# Altium PCB smartwatch.PcbDoc
Units mm, origin at the board's own origin, x right, y up, seen from the top; angles counter-clockwise.
Board outline 90 x 40 mm, 2 copper layers (TOP01, BOTTOM04); 73 components, 55 nets, 301 pads, 503 vias.
Unrouted connection lines stored in the file: 2.
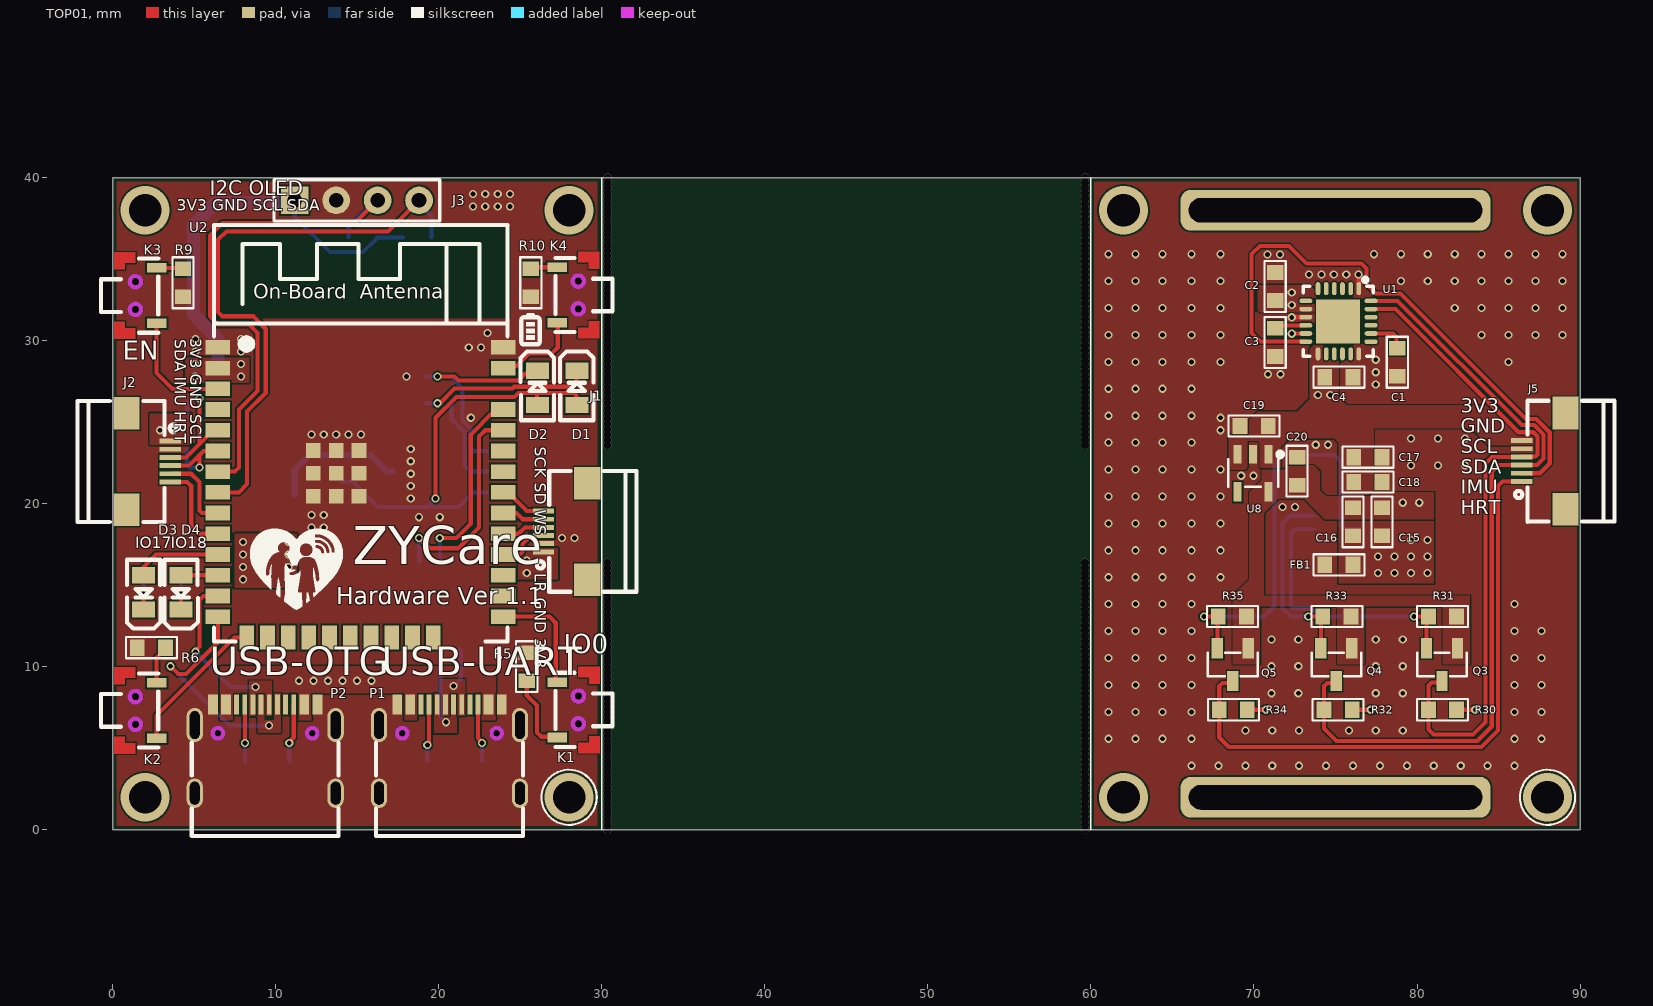
[diagram p0: TOP01 view]
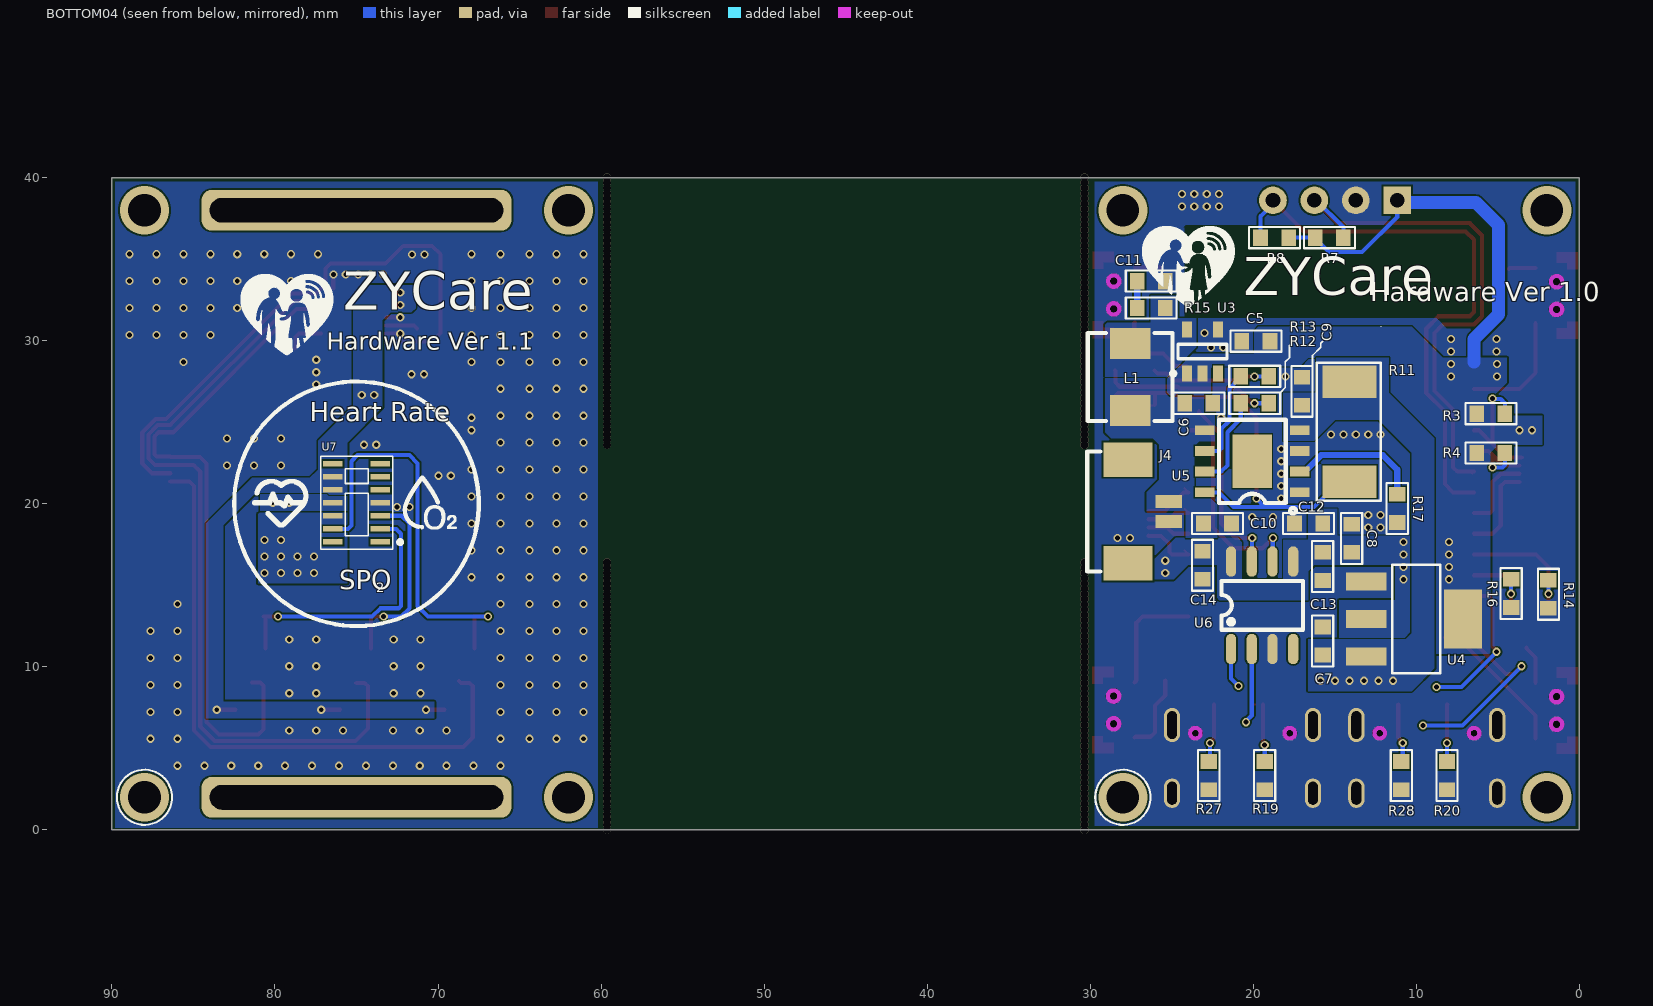
[diagram p1: BOTTOM04 view, seen from below]

## Layer stack, top to bottom
Top Solder: solder mask 0.0102, Solder Resist, Dk 3.5
TOP01: signal copper 0.0356
Dielectric 1: dielectric 0.32, FR-4, Dk 4.8
BOTTOM04: signal copper 0.0356
Bottom Solder: solder mask 0.0102, Solder Resist, Dk 3.5

## Board outline
0,0 90,0 90,40 0,40

## Design rules (kind name [scope] priority, off if disabled: settings)
Clearance [All] p1: gap=0.1 ignorepadtopadclearanceinfootprint=TRUE
ComponentClearance [All] p1 off: gap=0 collisioncheckmode=3 verticalgap=0 showdistances=FALSE
HoleToHoleClearance [All] p1: gap=0 allowstackedmicrovias=TRUE
PolygonConnect [All] p1: connectstyle=Direct reliefconductorwidth=0.254 reliefentries=4 polygonreliefangle="90 Angle" airgapwidth=0.254
RoutingVias [All] p1: holewidth=0.3 width=0.5 viastyle="Through Hole" minholewidth=0.3 minwidth=0.5 maxholewidth=9 maxwidth=10
SolderMaskExpansion [IsVia] p1: expansion=0.102 istentingtop=TRUE
SupplyNets "Schematic Supply Nets_2" [InNet('AGND')] p1: voltage=0.000
SupplyNets "Schematic Supply Nets" [InNet('GND')] p2: voltage=0.000
Width [All] p1: maxlimit=100 minlimit=0.1 preferedwidth=0.254
Width Width_PWR [InNetClass('All Nets')] p2: maxlimit=100 minlimit=0.127 preferedwidth=0.381
28 further rules are at their usual default settings.

## Classes and differential pairs
net class PWR: 1V8 3V3 5V0 AGND GND VBAT

## Components (designator, comment, footprint, x,y, rotation, side; value= is the part's Value field where it differs from the comment)
C1 "0.1uF" 0603 78.79,27.816 r90 top
C2 "10nF" 0603 71.297,34.187 r270 top
C3 "0.1uF" 0603 71.297,29.033 r90 top
C4 "0.1uF" 0603 76.07,27.763 r180 top
C5 "10uF" 0603 20.701,29.972 r180 bottom
C6 "10uF" 0603 22.479,26.162 r0 bottom
C7 "10uF" 0603 15.748,12.446 r270 bottom
C8 "10uF" 0603 13.97,18.743 r270 bottom
C9 "10uF" 0603 17.018,27.76 r270 bottom
C10 "10uF" 0603 21.336,18.796 r0 bottom
C11 "4.7nF" 0603 25.4,33.655 r0 bottom
C12 "10uF" 0603 17.473,18.796 r180 bottom
C13 "0.1uF" 0603 15.748,15.293 r90 bottom
C14 "0.1uF" 0603 23.114,15.367 r90 bottom
C15 "0.1uF" 0603 77.851,19.759 r270 top
C16 "4.7uF" 0603 76.073,19.759 r270 top
C17 "0.1uF" 0603 77.851,22.86 r180 top
C18 "10uF" 0603 77.851,21.336 r180 top
C19 "1uF" 0603 69.141,24.765 r0 top
C20 "1uF" 0603 72.644,22.86 r270 top
D1 "LED" LED0805-R-RD 28.448,27.051 r270 top
D2 "LED" LED0805-R-RD 26.035,27.051 r270 top
D3 "LED" LED0805-R-RD 1.932,14.633 r90 top
D4 "LED" LED0805-R-RD 4.218,14.633 r90 top
FB1 "BLM18PG121SN1D" 0603 74.348,16.256 r0 top
J1 "CON6" FPC-SMD_P0.50-6P_AFC01-S06FCA-00 29.083,18.288 r90 top locked
J2 "CON6" FPC-SMD_P0.50-6P_AFC01-S06FCA-00 0.889,22.606 r270 top locked
J3 "CON4" HDR2.54-M-LI-4P 14.986,38.608 r0 top
J4 "CON2" SIP-1.25-2P 27.686,22.7 r270 bottom locked
J5 "CON6" FPC-SMD_P0.50-6P_AFC01-S06FCA-00 89.071,22.606 r90 top
K1 "TS24CA" SW-SMD_TS24CA 28.575,7.341 r270 top
K2 "TS24CA" SW-SMD_TS24CA 1.397,7.341 r90 top
K3 "TS24CA" SW-SMD_TS24CA 1.397,32.786 r90 top
K4 "TS24CA" SW-SMD_TS24CA 28.565,32.786 r270 top
L1 "10uH" IND-SMD_L5.4-W5.2_FXL0530 27.559,27.813 r90 bottom
P1 "USBC-16PIN" USB-C-SMD_G-SWITCH_GT-USB-7010ASV 20.701,3.302 r0 top locked
P2 "USBC-16PIN" USB-C-SMD_G-SWITCH_GT-USB-7010ASV 9.398,3.302 r0 top locked
Q3 "SI2302" SOT-23-3_L2.9-W1.3-P1.90-LS2.4-BR 81.534,10.287 r90 top
Q4 "SI2302" SOT-23-3_L2.9-W1.3-P1.90-LS2.4-BR 75.057,10.287 r90 top
Q5 "SI2302" SOT-23-3_L2.9-W1.3-P1.90-LS2.4-BR 68.707,10.287 r90 top
R3 "2.2K" 0603 4.572,25.527 r0 bottom
R4 "2.2K" 0603 4.572,23.114 r0 bottom
R5 "470R" 0603 25.4,9.144 r90 top
R6 "470R" 0603 3.249,11.176 r180 top
R7 "2.2K" 0603 16.203,36.322 r180 bottom
R8 "2.2K" 0603 17.833,36.322 r0 bottom
R9 "470R" 0603 4.318,34.417 r270 top
R10 "470R" 0603 25.654,34.417 r270 top
R11 "0.4R" 2512 14.097,24.511 r90 bottom
R12 "470R" 0603 20.775,26.162 r180 bottom
R13 "470R" 0603 20.775,27.813 r180 bottom
R14 "470R" 0603 1.905,13.589 r90 bottom
R15 "0.5R" 0603 27.125,32.004 r180 bottom
R16 "470R" 0603 4.191,13.642 r90 bottom
R17 "2.4K" 0603 11.176,20.574 r270 bottom
R19 "5.1K" 0603 19.304,2.466 r90 bottom
R20 "5.1K" 0603 8.128,2.466 r90 bottom
R27 "5.1K" 0603 22.733,2.466 r90 bottom
R28 "5.1K" 0603 10.922,2.466 r90 bottom
R30 "10K" 0603 80.698,7.366 r0 top
R31 "10K" 0603 80.698,13.081 r0 top
R32 "10K" 0603 74.295,7.366 r0 top
R33 "10K" 0603 74.221,13.081 r0 top
R34 "10K" 0603 67.871,7.366 r0 top
R35 "10K" 0603 67.818,13.081 r0 top
U1 "MPU6050" QFN-24_L4.0-W4.0-P0.50-BL-EP2.7 75.164,31.192 r180 top
U2 "ESP32-S3-WROOM-1-N16R8" WIRELM-SMD_ESP32-S3-WROOM-1_reduced 15.621,23.495 r0 top locked
U3 "PW5100" SOT95P280X125-5N 23.114,29.337 r90 bottom
U4 "AMS1117" SOT223 10.033,12.954 r270 bottom
U5 "TP4056" ESOP-8_L4.9-W3.9-P1.27-LS6.0-BL-EP 20.066,22.606 r0 bottom
U6 "CH340N" SOP-8_L4.9-W3.9-P1.27-LS6.0-BL 19.431,13.716 r180 bottom
U7 "MAX30102EFD+T" OESIP-14_L5.6-W3.3-P0.80-TL 75,20 r0 bottom locked
U8 "TP5108E23E-18" SOT-23-5_L3.0-W1.7-P0.95-LS2.8-BL 69.977,21.844 r180 top

## Footprints (in the part's own frame and the unit in brackets; to place one, negate y for a bottom-side part, rotate by r counter-clockwise, add the part's x,y. Pads: shape width x height; smd on the part's side, far side on the other; paste and mask are expansions set on the pad)
0603 [mm]
  rect 0.9x1 smd: 1(0,0) 2(1.725,0)
  silkscreen extent -0.7,-0.65 2.42,0.65
2512 [mm]
  rect 2x3.3 smd: 1(-3.155,0) 2(2.977,0)
  silkscreen extent -4.32,-1.91 4.14,2.01
ESOP-8_L4.9-W3.9-P1.27-LS6.0-BL-EP [mm]
  rect 1.2x0.6 smd: 1(-2.908,1.905) 2(-2.908,0.635) 3(-2.908,-0.635) 4(-2.908,-1.905) 5(2.908,-1.905) 6(2.908,-0.635) 7(2.908,0.635) 8(2.908,1.905)
  rect 2.4x3.3 smd: 9(0,0)
  silkscreen extent -2.67,-2.55 2.05,3.2
FPC-SMD_P0.50-6P_AFC01-S06FCA-00 [mm]
  rect 0.3x1.3 smd: 1(-1.235,2.652) 2(-0.735,2.652) 3(-0.235,2.652) 4(0.265,2.652) 5(0.765,2.652) 6(1.265,2.652)
  rect 2x1.6 smd: 7(-2.937,-0.026) 8(2.963,-0.026)
  silkscreen extent -3.71,-3.05 3.71,3.06
HDR2.54-M-LI-4P [mm] "排母，4脚"
  rect 1.7x1.7 hole 0.9: 1(-3.81,0)
  round 1.7 hole 0.9: 2(-1.27,0) 3(1.27,0) 4(3.81,0)
  silkscreen extent -5.08,-1.27 5.08,1.27, body extent -5.08,-1.27 5.08,1.27, height 8.5
IND-SMD_L5.4-W5.2_FXL0530 [mm]
  rect 1.9x2.5 smd: 1(-2.098,-0.007) 2(2.002,-0.007)
  silkscreen extent -2.75,-2.61 2.65,2.59
LED0805-R-RD [mm] "0805 LED"
  rect 1x1.4 smd: 1(0.988,0.027) 2(-1.113,0.027)
  silkscreen extent -2.29,-1.02 1.93,1.04
OESIP-14_L5.6-W3.3-P0.80-TL [mm] "高灵敏度脉搏血氧仪和心率传感器"
  rect 1.2x0.35 smd paste+0 mask+0.05: 1(-1.461,2.337) 2(-1.461,1.537) 3(-1.461,0.737) 4(-1.461,-0.063) 5(-1.461,-0.863) 6(-1.461,-1.663) 7(-1.461,-2.462) 8(1.447,-2.463) 9(1.447,-1.663) 10(1.447,-0.863) 11(1.447,-0.063) 12(1.447,0.737) 13(1.447,1.538) 14(1.447,2.337)
  silkscreen extent -2.79,-2.92 2.19,2.78
QFN-24_L4.0-W4.0-P0.50-BL-EP2.7 [mm]
  oval 0.28x0.8 smd paste-100 mask+0.05: 1(-1.262,-2) 2(-0.763,-2) 3(-0.262,-2) 4(0.237,-2) 5(0.738,-2) 6(1.237,-2) 13(1.237,2) 14(0.738,2) 15(0.237,2) 16(-0.262,2) 17(-0.763,2) 18(-1.255,2)
  oval 0.8x0.28 smd paste-100 mask+0.05: 7(1.988,-1.25) 8(1.988,-0.75) 9(1.988,-0.25) 10(1.988,0.25) 11(1.988,0.75) 12(1.988,1.25) 19(-2.012,1.25) 20(-2.012,0.75) 21(-2.012,0.25) 22(-2.012,-0.25) 23(-2.012,-0.75) 24(-2.012,-1.25)
  rect 2.7x2.7 smd paste-100 mask+0.05: 25(0,0)
  silkscreen extent -2.15,-2.79 2.15,2.15
SIP-1.25-2P [mm]
  rect 2.1x3 smd: 0(0,0) 0(6.35,0)
  rect 0.8x1.6 smd: 1(2.55,2.5) 2(3.8,2.5)
  silkscreen extent -0.5,-2.5 6.85,-1.7
SOP-8_L4.9-W3.9-P1.27-LS6.0-BL [mm]
  oval 0.63x1.865 smd: 1(-1.935,-2.624) 2(-0.665,-2.624) 3(0.605,-2.624) 4(1.875,-2.624) 5(1.875,2.741) 6(0.605,2.741) 7(-0.665,2.741) 8(-1.935,2.741)
  silkscreen extent -2.53,-1.44 2.47,1.54
SOT95P280X125-5N [mm] "SOT23, 5-Leads, Body 2.92x2.80mm, Pitch 0.95mm, IPC Medium Density"
  rect 1x0.6 smd: 1(-1.35,0.95) 2(-1.35,0) 3(-1.35,-0.95) 4(1.35,-0.95) 5(1.35,0.95)
  silkscreen extent -1.47,-1.5 0.45,1.93, body extent -0.85,-1.51 0.85,1.51, height 1.25
SOT223 [mm]
  rect 1.1x2.5 smd: 1(-2.276,-3.046) 2(0.024,-3.046) 3(2.324,-3.046)
  rect 3.6x2.34 smd: 4(0.024,2.894)
  silkscreen extent -3.3,-1.45 3.35,1.5
SOT-23-3_L2.9-W1.3-P1.90-LS2.4-BR [mm]
  rect 1.25x0.7 smd: 1(0.847,-0.948) 2(0.847,0.952) 3(-1.153,0.002)
  silkscreen extent -0.88,-1.52 0.57,1.53
SOT-23-5_L3.0-W1.7-P0.95-LS2.8-BL [mm]
  rect 0.49x1.157 smd: 1(-0.927,-1.196) 2(0.023,-1.196) 3(0.973,-1.196)
  rect 0.49x1.175 smd: 4(0.973,1.111) 5(-0.927,1.111)
  silkscreen extent -1.78,-1.34 1.55,0.81
SW-SMD_TS24CA [mm] "4.55*1.8*3.5mm 卧贴 轻触开关"
  rect 0.6x1.2 smd: 1(-1.717,-1.305) 2(1.683,-1.305)
  TOP01 region: -1.617,0.645 -1.617,0.645 -2.017,0.645 -2.017,-0.005 -2.667,-0.005 -2.667,1.295 -1.617,1.295 -1.617,0.645
  TOP01 region: 2.633,-0.005 1.983,-0.005 1.983,0.645 1.583,0.645 1.583,0.645 1.583,1.295 2.633,1.295 2.633,-0.005
  Keep-Out Layer board cut-out: 1.183,-0.005 1.135,0.168 1.007,0.295 0.833,0.341 0.659,0.295 0.531,0.168 0.483,-0.005 0.483,-0.005 0.531,-0.178 0.659,-0.305 0.833,-0.351 1.007,-0.305 1.135,-0.178 1.183,-0.005
  Keep-Out Layer board cut-out: -0.517,-0.005 -0.565,0.168 -0.693,0.295 -0.867,0.341 -1.041,0.295 -1.169,0.168 -1.217,-0.005 -1.217,-0.005 -1.169,-0.178 -1.041,-0.305 -0.867,-0.351 -0.693,-0.305 -0.565,-0.178 -0.517,-0.005
  Keep-Out Layer circle w0.254: c0.833,-0.005 r0.35
  Keep-Out Layer circle w0.025: c0.833,-0.005 r0.35
  Keep-Out Layer circle w0.254: c-0.867,-0.005 r0.35
  Keep-Out Layer circle w0.025: c-0.867,-0.005 r0.35
  silkscreen extent -2.29,-1.4 2.26,2.1
USB-C-SMD_G-SWITCH_GT-USB-7010ASV [mm]
  oval 1x2.1 hole 0.6 slot 1.7 at 90 deg paste-2539.97 mask+0.05: 1(-4.357,3.127) 2(4.283,3.127)
  oval 1x1.8 hole 0.6 slot 1.4 at 90 deg paste-2539.97 mask+0.05: 3(4.283,-1.053) 4(-4.357,-1.053)
  rect 0.6x1.24 smd paste-100 mask+0.05: A1B12(-3.237,4.382) A4B9(-2.437,4.382) B1A12(3.163,4.382) B4A9(2.363,4.382)
  rect 0.3x1.24 smd paste-100 mask+0.05: A5(-1.287,4.382) A6(-0.287,4.382) A7(0.213,4.382) A8(1.213,4.382) B5(1.713,4.382) B6(0.713,4.382) B7(-0.787,4.382) B8(-1.787,4.382)
  Keep-Out Layer board cut-out: -2.612,2.627 -2.656,2.789 -2.775,2.907 -2.937,2.95 -3.099,2.907 -3.218,2.789 -3.262,2.627 -3.262,2.627 -3.218,2.465 -3.099,2.347 -2.937,2.304 -2.775,2.347 -2.656,2.466 -2.612,2.627
  Keep-Out Layer board cut-out: 3.178,2.627 3.134,2.789 3.015,2.907 2.853,2.95 2.691,2.907 2.572,2.789 2.528,2.627 2.528,2.627 2.572,2.465 2.691,2.347 2.853,2.304 3.015,2.347 3.134,2.466 3.178,2.627
  Keep-Out Layer circle w0.254: c-2.937,2.627 r0.325
  Keep-Out Layer circle w0.025: c-2.937,2.627 r0.325
  Keep-Out Layer circle w0.254: c2.853,2.627 r0.325
  Keep-Out Layer circle w0.025: c2.853,2.627 r0.325
  silkscreen extent -4.54,-3.68 4.46,2.04
WIRELM-SMD_ESP32-S3-WROOM-1_reduced [mm] "通用型Wi-Fi+低功耗蓝牙MCU模组"
  rect 1.5x0.9 smd paste+0 mask+0.05: 1(-9.156,6.094) 2(-9.156,4.824) 3(-9.156,3.554) 4(-9.156,2.284) 5(-9.156,1.014) 6(-9.156,-0.256) 7(-9.156,-1.526) 8(-9.156,-2.796) 9(-9.156,-4.066) 10(-9.156,-5.336) 11(-9.156,-6.606) 12(-9.156,-7.876) 13(-9.156,-9.146) 14(-9.156,-10.416) 27(8.344,-10.416) 28(8.344,-9.146) 29(8.344,-7.876) 30(8.344,-6.606) 31(8.344,-5.336) 32(8.344,-4.066) 33(8.344,-2.796) 34(8.344,-1.526) 35(8.344,-0.256) 36(8.344,1.014) 37(8.344,2.284) 39(8.344,4.824) 40(8.344,6.094)
  rect 0.9x1.5 smd paste+0 mask+0.05: 15(-7.391,-11.696) 16(-6.121,-11.696) 17(-4.851,-11.696) 18(-3.581,-11.696) 19(-2.311,-11.696) 20(-1.041,-11.696) 21(0.229,-11.696) 22(1.499,-11.696) 23(2.769,-11.696) 24(4.039,-11.696)
  rect 0.9x0.9 smd: 41(-3.306,-3.026) 41(-3.306,-1.626) 41(-3.306,-0.226) 41(-1.906,-3.026) 41(-1.906,-1.626) 41(-1.906,-0.226) 41(-0.506,-3.026) 41(-0.506,-1.626) 41(-0.506,-0.226)
  silkscreen extent -9.41,-11.95 8.61,13.59

## Part data
C1 C2 C3 C4 C5 C6 C7 C8 C9 C10 C11 C12 C13 C14 C15 C16 C17 C18 C19 C20: library part C, "电容"
FB1: library part FB, "磁珠"
K1 K2 K3 K4: "4.55*1.8*3.5mm 卧贴 轻触开关"
L1: library part L, "电感"
P1 P2: "USB Type-C母座 16PIN 卧贴"
Q3 Q4 Q5: library part "MOSFET N"
R3 R4 R5 R6 R7 R8 R9 R10 R11 R12 R13 R14 R15 R16 R17 R19 R20 R27 R28 R30 R31 R32 R33 R34 R35: library part R, "电阻"
U1: "三轴加速度计和三轴陀螺仪，工作电压：2.375V~3.46V"
U2: "通用型Wi-Fi+低功耗蓝牙MCU模组"
U3: "DC-DC"
U4: "LDO 线性稳压器"
U5: "1A线性锂离子电池充电器"
U6: "USB2.0芯片CH340N"
U7: "高灵敏度脉搏血氧仪和心率传感器"
U8: "LDO 输出1.8V 500mA"

## Free pads (board coordinates)
  rrect50% 19x2.5 hole 1.5 slot 18 at 0 deg: 2(75,2) 2(75,38)

## Via types
v1: diameter 0.5, hole 0.3, TOP01 to BOTTOM04, tented both sides, 279 vias
v2: diameter 0.5, hole 0.5, TOP01 to BOTTOM04, tented both sides, 216 vias
v3: diameter 3, hole 2, TOP01 to BOTTOM04, 8 vias

## Nets (pads, with @x,y where several pads share a name; then routed paths per layer and width w, separated by ;. In a path a pad name is that pad's centre, name@x,y a point inside that pad or via, vN(x,y) a via of type N, cw(c..) or ccw(c..) an arc to the next point about the centre after c; other vN are vias at no path point)
1V8: C15.1 C16.1 C20.2 Q3.1 Q4.1 Q5.1 R31.2 R33.2 R35.2 U7.11 U8.5
  other v1: 79.121,20.066 80.137,20.066
3V3: C2.2 C4.2 C5.2 C8.2 C12.2 C13.2 C14.2 C17.2 C18.2 C19.2 J1.1 J2.1 J3.1 J5.6 R3.2 R4.2 R7.1 R8.1 R30.2 R32.2 R34.2 U1.8 U1.13 U2.2 U3.1 U3.2 U4.2 U4.4 U6.5 U6.8 U7.9 U7.10 U8.1 U8.3 | length 28.3
  TOP01 w0.254: R34.2 v1(70.739,7.366) ; R32.2 v1(77.163,7.366) ; R30.2 v1(83.566,7.366)
  BOTTOM04 w0.254: J3.1 11.176,37.592 13.335,35.433 15.364,35.433 16.203,36.272 R7.1 R8.1
  BOTTOM04 w0.8: 6.477,28.702 6.477,30.099 4.953,31.623 4.953,37.084 6.35,38.481 11.049,38.481 J3.1
  other v1: 8.001,15.367 10.795,15.367 25.4,15.748 8.001,16.129 10.795,16.129 25.4,16.51 8.001,16.891 10.795,16.891 8.001,17.653 10.795,17.653 2.921,24.511 3.683,24.511 73.914,26.67 74.676,26.67 5.056,27.813 7.874,27.813 5.056,28.575 7.874,28.575 72.318,32.197 72.318,32.959
5V0: C7.2 C9.2 P1.A4B9 P1.B4A9 P2.A4B9 P2.B4A9 R11.2 U4.3 U5.4
  other v1: 11.43,9.144 12.319,9.144 13.208,9.144 14.097,9.144 14.986,9.144 15.875,9.144
AGND: C15.2 C16.2 FB1.2 U7.12
  other v1: 77.597,15.748 78.613,15.748 79.629,15.748 80.645,15.748 77.597,16.764 78.613,16.764 79.629,16.764 80.645,16.764 79.629,17.78 80.645,17.78
ESP_EN/BTN3: K3.1 U2.3 | length 7.2
  TOP01 w0.127: U2.3 U2.3@6.467,27.051
  TOP01 w0.254: K3.1 2.702,28.032 3.685,27.049 U2.3
ESP_IO0/BTN1: K1.1 U2.27 | length 7.1
  TOP01 w0.127: U2.27@23.963,13.081 U2.27
  TOP01 w0.254: U2.27 26.799,13.079 27.178,12.7 27.178,9.15 K1.1
ESP_IO1/BTN4: K4.2 U2.39 | length 5.4
  TOP01 w0.254: U2.39 24.094,28.448 24.765,28.448 25.527,29.21 26.924,29.21 27.305,29.591 27.305,31.058 K4.2
ESP_IO8/BTN2: K2.1 U2.15 | length 8.9
  TOP01 w0.127: U2.15 U2.15@8.255,11.774
  TOP01 w0.254: K2.1 2.702,7.02 7.481,11.799 U2.15
ESP_IO17/LED1: D3.1 U2.11 | length 5.4
  TOP01 w0.254: D3.1 1.905,16.129 2.665,16.889 U2.11
ESP_IO18/LED2: D4.1 U2.12 | length 2.3
  TOP01 w0.254: D4.1 4.193,15.619 U2.12
ESP_LR_MIC: J1.3 U2.30 | length 3.6
  TOP01 w0.127: U2.30 U2.30@24.221,17.145
  TOP01 w0.254: U2.30 24.997,16.889 25.146,17.038 25.146,17.526 25.654,18.034 26.412,18.034 J1.3
ESP_MAX30102_INT: J2.6 U2.10 | length 5.5
  TOP01 w0.254: J2.6@3.668,21.341 4.567,21.341 4.826,21.082 4.826,18.669 5.334,18.161 6.463,18.161 U2.10
ESP_MPU6050_INT: J2.5 U2.9 | length 4.8
  TOP01 w0.254: J2.5@3.668,21.841 4.823,21.841 5.334,21.33 5.334,19.58 5.483,19.431 6.463,19.431 U2.9
ESP_RXD0: U2.36 U6.6 | length 13.2
  TOP01 w0.254: v1(18.796,17.907) 19.431,17.272 21.209,17.272 22.479,18.542 22.479,24.13 22.86,24.511 23.963,24.511 U2.36
  BOTTOM04 w0.254: v1(18.796,17.907) 18.811,17.892 18.811,16.472 U6.6
ESP_SCK_MIC: J1.6 U2.33 | length 3.3
  TOP01 w0.127: U2.33 U2.33@24.221,20.955
  TOP01 w0.254: U2.33 24.265,20.699 25.406,19.558 26.426,19.558 J1.6
ESP_SCL: J2.3 R3.1 U2.5 | length 7.9
  TOP01 w0.254: J2.3 4.497,22.841 5.331,23.675 ; v1(5.331,26.458) 5.331,23.675 ; U2.5 6.165,24.509 5.331,23.675
  BOTTOM04 w0.254: R3.1 4.572,26.162 4.826,26.416 5.289,26.416 v1(5.331,26.458)
ESP_SCL_OLED: J3.3 R7.2 U2.7 | length 32.9
  TOP01 w0.127: U2.7 U2.7@6.59,21.844
  TOP01 w0.254: U2.7 7.491,21.969 7.747,22.225 7.747,25.781 8.89,26.924 8.89,30.48 8.382,30.988 6.477,30.988 5.969,31.496 5.969,36.449 6.731,37.211 14.859,37.211 J3.3
  BOTTOM04 w0.254: R7.2 14.478,36.957 16.129,38.608 J3.3
ESP_SD_MIC: J1.5 U2.32 | length 3
  TOP01 w0.127: U2.32 U2.32@24.221,19.685
  TOP01 w0.254: U2.32 24.767,19.429 25.143,19.053 J1.5
ESP_SDA: J2.4 R4.1 U2.6 | length 5.7
  TOP01 w0.254: J2.4@3.668,22.341 4.699,22.341 5.334,22.976 ; v1(5.334,22.225) 5.334,22.976 ; U2.6 6.456,23.23 5.588,23.23 5.334,22.976
  BOTTOM04 w0.254: R4.1@4.572,23.368 4.572,22.374 4.721,22.225 v1(5.334,22.225)
ESP_SDA_OLED: J3.4 R8.2 U2.8 | length 35.7
  TOP01 w0.254: U2.8 7.745,20.699 8.255,21.209 8.255,25.654 9.398,26.797 9.398,30.734 8.636,31.496 6.731,31.496 6.477,31.75 6.477,36.195 6.985,36.703 16.891,36.703 J3.4
  BOTTOM04 w0.254: J3.4 18.796,38.391 19.558,37.629 R8.2
ESP_TXD0: U2.37 U6.7 | length 11.2
  TOP01 w0.254: v1(20.066,17.907) 21.082,17.907 21.971,18.796 21.971,24.257 23.338,25.624 U2.37@23.338,25.672
  BOTTOM04 w0.254: v1(20.066,17.907) 20.081,17.892 U6.7@20.081,16.472
ESP_WS_MIC: J1.4 U2.31 | length 2.6
  TOP01 w0.254: U2.31 23.967,18.161 24.892,18.161 25.284,18.553 J1.4
GND: C1.1 C2.1 C3.1 C4.1 C5.1 C6.1 C7.1 C8.1 C9.1 C10.1 C11.1 C12.1 C13.1 C14.1 C17.1 C18.1 C19.1 C20.1 FB1.1 J1.2 J2.2 J3.2 J4.2 J5.5 P1.1 P1.2 P1.3 P1.4 P1.A1B12 P1.B1A12 P2.1 P2.2 P2.3 P2.4 P2.A1B12 P2.B1A12 R5.2 R6.2 R9.2 R10.2 R14.1 R16.1 R17.2 R19.1 R20.1 R27.1 R28.1 U1.1 U1.9 U1.11 U1.18 U2.1 U2.40 U2.41 U3.4 U4.1 U5.1 U5.3 U6.3 U7.4 U8.2 | length 2.6
  TOP01 w0.254: v1(72.313,30.43) 72.32,30.437 73.171,30.437 U1.11 ; v1@72.325,31.442 U1.9 ; U1.1 v1@76.426,34.044
  other v1: 66.167,3.937 67.818,3.937 69.469,3.937 71.12,3.937 72.771,3.937 74.422,3.937 76.073,3.937 77.724,3.937 79.375,3.937 81.026,3.937 82.677,3.937 84.328,3.937 85.979,3.937 61.087,5.588 62.738,5.588 64.389,5.588 66.167,5.588 85.979,5.588 87.63,5.588 69.469,6.096 71.12,6.096 72.771,6.096 75.819,6.096 77.47,6.096 79.121,6.096 61.087,7.239 62.738,7.239 64.389,7.239 66.167,7.239 85.979,7.239 87.63,7.239 71.067,8.382 72.718,8.382 77.47,8.382 79.121,8.382 61.087,8.89 62.738,8.89 64.389,8.89 66.167,8.89 85.979,8.89 87.63,8.89 71.067,10.033 72.718,10.033 77.47,10.033 79.121,10.033 61.087,10.541 62.738,10.541 64.389,10.541 66.167,10.541 85.979,10.541 87.63,10.541 71.067,11.684 72.718,11.684 77.47,11.684 79.121,11.684 61.087,12.192 62.738,12.192 64.389,12.192 66.167,12.192 85.979,12.192 87.63,12.192 61.087,13.843 62.738,13.843 64.389,13.843 66.167,13.843 85.979,13.843 61.087,15.494 62.738,15.494 64.389,15.494 66.167,15.494 67.945,15.494 61.087,17.145 62.738,17.145 64.389,17.145 66.167,17.145 67.945,17.145 27.559,17.907 28.321,17.907 12.192,18.542 12.954,18.542 61.087,18.796 62.738,18.796 64.389,18.796 66.167,18.796 67.945,18.796 18.796,19.177 20.066,19.177 12.192,19.304 12.954,19.304 71.755,19.812 72.517,19.812 18.288,20.32 61.087,20.447 62.738,20.447 64.389,20.447 66.167,20.447 67.945,20.447 18.288,21.082 69.215,21.717 69.977,21.717 18.288,21.844 61.087,22.098 62.738,22.098 64.389,22.098 66.167,22.098 67.945,22.098 79.629,22.352 81.28,22.352 82.931,22.352 18.288,22.606 18.288,23.368 73.787,23.622 74.549,23.622 61.087,23.749 62.738,23.749 64.389,23.749 66.167,23.749 79.629,24.003 81.28,24.003 82.931,24.003 12.192,24.257 12.954,24.257 13.716,24.257 14.478,24.257 15.24,24.257 67.945,24.511 21.971,25.273 67.945,25.273 61.087,25.4 62.738,25.4 64.389,25.4 66.167,25.4 61.087,27.051 62.738,27.051 64.389,27.051 66.167,27.051 77.47,27.305 18.034,27.813 70.866,27.94 71.628,27.94 77.47,28.067 61.087,28.702 62.738,28.702 64.389,28.702 66.167,28.702 67.945,28.702 85.611,28.702 77.47,28.829 5.08,29.337 7.874,29.337 21.844,29.591 22.606,29.591 5.08,30.099 7.874,30.099 61.087,30.353 62.738,30.353 64.389,30.353 66.167,30.353 67.945,30.353 83.96,30.353 85.611,30.353 87.262,30.353 88.913,30.353 22.987,30.48 72.318,31.435 61.087,32.004 62.738,32.004 64.389,32.004 66.167,32.004 67.945,32.004 82.309,32.004 83.96,32.004 85.611,32.004 87.262,32.004 88.913,32.004 61.087,33.655 62.738,33.655 64.389,33.655 66.167,33.655 67.945,33.655 79.007,33.655 80.658,33.655 82.309,33.655 83.96,33.655 85.611,33.655 87.262,33.655 88.913,33.655 73.371,34.051 74.133,34.051 74.895,34.051 75.657,34.051 76.419,34.051 70.839,35.28 71.601,35.28 61.087,35.306 62.738,35.306 64.389,35.306 66.167,35.306 67.945,35.306 77.356,35.306 79.007,35.306 80.658,35.306 82.309,35.306 83.96,35.306 85.611,35.306 87.262,35.306 88.913,35.306 22.098,38.227 22.86,38.227 23.622,38.227 24.384,38.227 22.098,38.989 22.86,38.989 23.622,38.989 24.384,38.989
MAX30102_INT: J5.1 Q5.3 R34.1 | length 38.4
  TOP01 w0.254: Q5.3 68.588,9.017 68.072,9.017 67.871,8.816 R34.1 67.871,5.662 68.453,5.08 83.947,5.08 84.963,6.096 84.963,21.082 85.252,21.371 J5.1
MAX30102_INT_1V8: Q5.2 R35.1 U7.13 | length 25.7
  TOP01 w0.254: v1(66.929,13.081) R35.1 ; Q5.2 R35.1@67.755,13.018
  BOTTOM04 w0.254: v1(66.929,13.081) 70.612,13.081 71.247,13.716 71.247,22.479 71.755,22.987 74.93,22.987 75.311,22.606 75.311,18.669 75.518,18.462 U7.13
MPU6050_INT: J5.2 U1.12 | length 36
  TOP01 w0.254: U1.12 70.388,29.942 69.85,30.48 69.85,35.306 70.358,35.814 72.136,35.814 73.215,34.734 76.581,34.734 76.896,34.419 76.896,33.467 77.47,32.893 78.994,32.893 86.681,25.206 87.309,25.206 88.138,24.377 88.138,22.479 87.53,21.871 J5.2
NetC1_2: C1.2 U1.20 | length 2.4
  TOP01 w0.254: U1.20 78.524,30.442 78.74,30.226 78.74,29.591 C1.2
NetC3_2: C3.2 U1.10 | length 2
  TOP01 w0.254: C3.2 71.481,30.942 U1.10
NetC11_2: C11.2 R15.1 | length 1.7
  BOTTOM04 w0.381: R15.1 C11.2
NetD1_1: D1.1 D2.1 R11.1 U5.8 | length 26.6
  TOP01 w0.127: D2.1@26.035,26.035 D2.1@26.416,26.035 ; D2.1@26.035,26.036 D2.1
  TOP01 w0.254: v1(19.812,20.32) 19.812,25.273 21.082,26.543 24.638,26.543 24.892,26.797 26.035,26.797 ; D2.1 26.035,26.09 26.035,26.797 ; D1.1 28.448,26.09 28.448,26.648 28.299,26.797 26.035,26.797
  BOTTOM04 w0.254: R11.1 14.747,21.356 16.291,19.812 19.304,19.812 ; v1(19.812,20.32) 19.304,19.812 ; U5.8 22.098,20.701 21.209,19.812 19.304,19.812
NetD1_2: D1.2 R12.2 | length 10.5
  TOP01 w0.254: v1@20.066,26.162 20.969,27.065 24.525,27.065 24.638,27.178 28.194,27.178 28.448,27.432 28.448,28.137 D1.2
  BOTTOM04 w0.254: R12.2@19.177,26.162 v1@20.066,26.162
  other v1: 19.939,26.162
NetD2_2: D2.2 R13.2 | length 7.2
  TOP01 w0.254: v1@20.066,27.813 20.955,27.813 21.209,27.559 24.892,27.559 25.312,27.979 25.877,27.979 D2.2
  BOTTOM04 w0.254: R13.2@19.177,27.813 v1@20.066,27.813
  other v1: 19.939,27.813
NetD3_2: D3.2 R14.2 | length 1.8
  TOP01 w0.254: D3.2 v1(1.905,14.478)
  BOTTOM04 w0.254: v1(1.905,14.478) R14.2
NetD4_2: D4.2 R16.2 | length 1.8
  TOP01 w0.254: D4.2 v1(4.191,14.478)
  BOTTOM04 w0.254: v1(4.191,14.478) R16.2
NetK1_2: K1.2 R5.1 | length 4.9
  TOP01 w0.127: R5.1 R5.1@25.486,9.058
  TOP01 w0.254: R5.1 25.4,8.255 26.035,7.62 26.035,5.969 26.289,5.715 27.213,5.715 K1.2
NetK2_2: K2.2 R6.1 | length 2.4
  TOP01 w0.254: K2.2 2.702,10.579 3.249,11.126 R6.1
NetK3_2: K3.2 R9.1 | length 1.6
  TOP01 w0.254: K3.2 4.266,34.469 R9.1
NetK4_1: K4.1 R10.1 | length 1.6
  TOP01 w0.254: R10.1 25.74,34.503 K4.1
NetL1_2: L1.2 R15.2 U3.5
NetP1_A5: P1.A5 R19.2 | length 3.7
  TOP01 w0.127: v1(19.304,5.207) v1@19.359,5.262 ; P1.A5@19.359,7.629 P1.A5
  TOP01 w0.254: v1(19.304,5.207) 19.304,5.274 19.414,5.384 P1.A5
  BOTTOM04 w0.254: R19.2 v1(19.304,5.207)
NetP1_B5: P1.B5 R27.2 | length 3.7
  TOP01 w0.254: P1.B5 22.414,5.638 22.651,5.401 v1(22.651,5.334)
  BOTTOM04 w0.127: R27.2@22.651,4.273 R27.2 ; v1(22.651,5.334) v1@22.711,5.275
  BOTTOM04 w0.254: R27.2@22.651,4.273 v1(22.651,5.334)
NetP2_A5: P2.A5 R20.2 | length 3.5
  TOP01 w0.254: P2.A5 8.12,7.676 8.12,5.342 v1(8.128,5.334)
  BOTTOM04 w0.254: R20.2 v1(8.128,5.334)
NetP2_B5: P2.B5 R28.2 | length 3.6
  TOP01 w0.254: v1(10.84,5.334) 10.84,5.401 11.111,5.671 P2.B5
  BOTTOM04 w0.254: v1(10.84,5.334) 10.84,4.273 R28.2
NetR12_1: R12.1 U5.7 | length 5.7
  BOTTOM04 w0.254: R12.1 20.775,25.199 21.59,24.384 21.59,22.352 21.971,21.971 U5.7
NetR13_1: R13.1 U5.6 | length 5.9
  BOTTOM04 w0.254: R13.1@20.902,27.813 20.902,27.636 21.463,27.075 21.463,25.093 21.971,24.585 21.971,23.39 22.12,23.241 U5.6
NetR17_1: R17.1 U5.2 | length 8.3
  BOTTOM04 w0.381: R17.1 11.176,22.098 12.065,22.987 15.842,22.987 16.858,21.971 U5.2
SCL: J5.4 Q3.3 R30.1 U1.23 | length 41.3
  TOP01 w0.127: R30.1 R30.1@80.698,7.416
  TOP01 w0.254: U1.23 78.675,31.942 86.233,24.384 87.129,24.384 87.376,24.137 87.376,23.02 87.25,22.894 86.442,22.894 J5.4 84.593,22.871 84.201,22.479 84.201,6.604 83.439,5.842 81.026,5.842 80.698,6.17 R30.1 ; R30.1@80.698,7.391 80.698,8.841 80.899,9.042 Q3.3@81.415,9.042
SCL_1V8: Q3.2 R31.1 U7.2 | length 16.8
  TOP01 w0.127: R31.1@80.582,12.965 R31.1
  TOP01 w0.254: v1(79.809,13.081) R31.1 ; Q3.2 R31.1@80.582,12.965
  BOTTOM04 w0.127: U7.2 U7.2@73.793,18.463
  BOTTOM04 w0.254: U7.2 72.565,18.463 72.263,18.161 72.263,13.738 72.412,13.589 73.533,13.589 74.041,13.081 v1(79.809,13.081)
SDA: J5.3 Q4.3 R32.1 U1.24 | length 49
  TOP01 w0.127: R32.1 R32.1@74.295,7.416
  TOP01 w0.254: Q4.3@75.012,9.017 74.496,9.017 74.295,8.816 R32.1 74.295,6.223 75.057,5.461 83.693,5.461 84.582,6.35 84.582,21.971 84.982,22.371 J5.3 87.357,22.371 87.757,22.771 87.757,24.257 87.185,24.828 86.423,24.828 78.81,32.442 U1.24
SDA_1V8: Q4.2 R33.1 U7.3 | length 12.1
  TOP01 w0.127: R33.1@74.105,12.965 R33.1
  TOP01 w0.254: v1(73.332,13.081) R33.1 ; Q4.2 R33.1@74.105,12.965
  BOTTOM04 w0.127: U7.3 U7.3@73.793,19.263
  BOTTOM04 w0.254: v1(73.332,13.081) 72.263,13.081 71.755,13.589 71.755,18.796 72.222,19.263 U7.3
USB1_DN: P1.A7 P1.B7 U6.2 | length 4.7
  TOP01 w0.127: P1.B7 P1.B7@19.926,7.697
  BOTTOM04 w0.254: U6.2 20.096,7.023 20.447,6.672 v1(20.447,6.605)
USB1_DP: P1.A6 P1.B6 U6.1 | length 2.5
  BOTTOM04 w0.254: v1(20.906,8.829) 21.366,9.289 21.366,10.965 U6.1@21.239,11.092
USB2_DN: P2.A7 P2.B7 U2.13 | length 9.1
  TOP01 w0.254: v1(5.08,10.922) 5.08,10.989 5.334,11.243 5.334,14.097 5.588,14.351 6.463,14.351 U2.13
  BOTTOM04 w0.254: v1(5.08,10.922) 7.239,8.763 v1(8.763,8.763)
USB2_DP: P2.A6 P2.B6 U2.14 | length 13
  TOP01 w0.254: v1(3.556,10.033) 4.033,9.556 4.516,9.556 6.465,11.505 U2.14
  BOTTOM04 w0.254: v1(3.556,10.033) 7.177,6.412 v1(9.603,6.412)
VBAT: C6.2 C10.2 J4.1 L1.1 U5.5
pads on no net: J1.7 J1.8 J2.7 J2.8 J4.0 J5.7 J5.8 P1.A8 P1.B8 P2.A8 P2.B8 U1.2 U1.3 U1.4 U1.5 U1.6 U1.7 U1.14 U1.15 U1.16 U1.17 U1.19 U1.21 U1.22 U1.25 U2.4 U2.16 U2.17 U2.18 U2.19 U2.20 U2.21 U2.22 U2.23 U2.24 U2.28 U2.29 U2.34 U2.35 U3.3 U5.9 U6.4 U7.1 U7.5 U7.6 U7.7 U7.8 U7.14 U8.4
copper on no net:
  other v2: 30.353,-0.005 59.647,-0.005 30.353,0.317 59.647,0.317 30.353,0.638 59.647,0.639 30.353,0.96 59.647,0.961 30.353,1.282 59.647,1.282 30.353,1.604 59.647,1.604 30.353,1.925 59.647,1.926 30.353,2.247 59.647,2.247 30.353,2.569 59.647,2.569 30.353,2.89 59.647,2.891 30.353,3.212 59.647,3.212 30.353,3.534 59.647,3.534 30.353,3.855 59.647,3.856 30.353,4.177 59.647,4.178 30.353,4.499 59.647,4.499 30.353,4.821 59.647,4.821 30.353,5.142 59.647,5.143 30.353,5.464 59.647,5.464 30.353,5.786 59.647,5.786 30.353,6.107 30.353,6.107 59.647,6.108 59.647,6.108 30.353,6.429 30.353,6.429 59.647,6.429 59.647,6.429 30.353,6.751 59.647,6.751 30.353,7.072 59.647,7.073 30.353,7.394 59.647,7.395 30.353,7.716 59.647,7.716 30.353,8.038 59.647,8.038 30.353,8.359 59.647,8.36 30.353,8.681 59.647,8.681 30.353,9.003 59.647,9.003 30.353,9.324 59.647,9.325 30.353,9.646 59.647,9.647 30.353,9.968 59.647,9.968 30.353,10.289 59.647,10.29 30.353,10.611 59.647,10.612 30.353,10.933 59.647,10.933 30.353,11.255 59.647,11.255 30.353,11.576 59.647,11.577 30.353,11.898 59.647,11.898 30.353,12.22 59.647,12.22 30.353,12.541 59.647,12.542 30.353,12.863 59.647,12.864 30.353,13.185 59.647,13.185 30.353,13.506 59.647,13.507 30.353,13.828 59.647,13.829 30.353,14.15 59.647,14.15 30.353,14.472 59.647,14.472 30.353,14.793 59.647,14.794 30.353,15.115 59.647,15.115 30.353,15.437 59.647,15.437 30.353,15.758 59.647,15.759 30.353,16.08 59.647,16.081 30.353,16.402 59.647,16.402 30.353,23.598 59.647,23.599 30.353,23.92 59.647,23.92 30.353,24.242 59.647,24.242 30.353,24.563 59.647,24.564 30.353,24.885 59.647,24.886 30.353,25.207 59.647,25.207 30.353,25.528 59.647,25.529 30.353,25.85 59.647,25.851 30.353,26.172 59.647,26.172 30.353,26.494 59.647,26.494 30.353,26.815 59.647,26.816 30.353,27.137 59.647,27.137 30.353,27.459 59.647,27.459 30.353,27.78 59.647,27.781 30.353,28.102 59.647,28.103 30.353,28.424 59.647,28.424 30.353,28.745 59.647,28.746 30.353,29.067 59.647,29.068 30.353,29.389 59.647,29.389 30.353,29.711 59.647,29.711 30.353,30.032 59.647,30.033 30.353,30.354 59.647,30.354 30.353,30.676 59.647,30.676 30.353,30.997 59.647,30.998 30.353,31.319 59.647,31.32 30.353,31.641 59.647,31.641 30.353,31.962 59.647,31.963 30.353,32.284 59.647,32.285 30.353,32.606 59.647,32.606 30.353,32.928 59.647,32.928 30.353,33.249 59.647,33.25 30.353,33.571 59.647,33.571 59.647,33.571 30.353,33.893 30.353,33.893 59.647,33.893 59.647,33.893 30.353,34.214 30.353,34.214 59.647,34.215 30.353,34.536 59.647,34.537 30.353,34.858 59.647,34.858 30.353,35.179 59.647,35.18 30.353,35.501 59.647,35.502 30.353,35.823 59.647,35.823 30.353,36.145 59.647,36.145 30.353,36.466 59.647,36.467 30.353,36.788 59.647,36.788 30.353,37.11 59.647,37.11 30.353,37.431 59.647,37.432 30.353,37.753 59.647,37.754 30.353,38.075 59.647,38.075 30.353,38.396 59.647,38.397 30.353,38.718 59.647,38.719 30.353,39.04 59.647,39.04 30.353,39.362 59.647,39.362 30.353,39.683 59.647,39.684 30.353,40.005 59.647,40.005
  other v3: 2,2 28,2 62,2 88,2 2,38 28,38 62,38 88,38

## Polygon pours and split planes (outlines as drawn)
GND on TOP01 "NONET_L-01_P-001" (solid, remove dead copper, pour order 124): 0.254,0.254 29.718,0.254 29.718,39.751 0.254,39.751
3V3 on TOP01 "TOP01-3V3 1" (solid, pour order 122): 68.453,22.098 69.469,22.098 69.596,22.225 69.596,23.876 70.231,23.876 70.358,23.749 70.358,22.225 70.485,22.098 71.628,22.098 71.628,23.495 72.136,24.003 74.93,24.003 75.184,23.749 75.184,20.447 77.089,20.447 77.343,20.701 77.343,24.638 83.312,24.638 84.371,23.579 87.376,23.579 87.376,24.137 87.129,24.384 86.233,24.384 84.582,26.035 75.692,26.035 75.184,26.543 75.184,29.718 73.66,29.718 73.406,29.464 73.406,26.416 72.644,25.654 70.231,25.654 69.723,25.146 69.723,24.257 68.453,24.257
1V8 on TOP01 "TOP01-1V8" (solid, remove dead copper, pour order 87): 68.707,10.16 70.358,10.16 70.358,13.716 75.11,13.716 75.11,10.16 76.761,10.16 76.761,13.716 76.76,13.716 81.587,13.716 81.587,10.16 83.238,10.16 83.238,14.351 70.612,14.351 70.612,19.431 71.501,20.32 73.078,20.32 74.348,19.05 81.026,19.05 81.026,20.701 77.343,20.701 77.089,20.447 74.422,20.447 74.041,20.828 74.041,21.971 73.66,22.352 72.136,22.352 71.882,22.098 70.485,22.098 70.485,21.463 69.723,20.701 69.723,15.367 68.707,14.351
GND on TOP01 "NONET_L-01_P-001" (solid, remove dead copper, pour order 126): 60.198,39.751 60.198,0.254 89.789,0.254 89.789,39.751
3V3 on TOP01 "3V3_L01_P119" (solid, pour order 119): 4.826,23.622 4.826,25.527 2.286,25.527 2.286,23.622
3V3 on TOP01 "3V3_L01_P111" (solid, pour order 111): 27.305,17.272 27.305,15.367 24.892,15.367 24.892,16.784 25.38,17.272 25.527,17.272
5V0 on TOP01 "5V0_L01_P091" (solid, pour order 91): 6.604,6.731 7.366,6.731 7.366,8.382 8.382,8.382 8.382,9.144 9.779,9.144 9.779,8.517 9.928,8.369 9.941,8.382 11.43,8.382 11.43,6.731 12.192,6.731 12.192,8.382 17.907,8.382 17.907,6.731 18.669,6.731 18.669,8.382 18.7,8.413 20.066,8.413 20.066,9.252 21.615,9.252 21.615,8.407 21.59,8.382 22.606,8.382 22.606,6.731 23.495,6.731 23.495,10.033 6.604,10.033
3V3 on TOP01 "NONET_L-01_P-001" (solid, remove dead copper, pour order 79): 73.787,31.75 70.358,31.75 70.231,31.877 70.231,33.401 73.406,33.401 73.787,33.02
USB2_DN on TOP01 "NONET_L-01_P-001" (solid, remove dead copper, pour order 47): 8.382,6.985 8.382,9.144 9.779,9.144 9.779,6.985 9.398,6.985 9.398,8.369 8.763,8.369 8.763,6.985
3V3 on TOP01 "TOP01-3V3" (solid, remove dead copper, pour order 43): 4.445,27.432 8.382,27.432 8.382,28.956 4.445,28.956
USB1_DN on TOP01 "NONET_L-01_P-001" (solid, remove dead copper, pour order 1): 21.114,8.363 21.114,5.949 19.717,5.949 19.717,8.363 20.098,8.363 20.098,6.979 20.733,6.979 20.733,8.363
USB1_DP on TOP01 "NONET_L-01_P-001" (solid, remove dead copper, pour order 0): 20.066,7.005 20.066,9.252 21.615,9.252 21.615,7.005 21.082,7.005 21.082,8.389 20.733,8.389 20.733,7.005
3V3 on TOP01 "3V3_L01_P092" (solid, pour order 92): 7.493,14.859 7.493,18.161 11.303,18.161 11.303,14.859
AGND on TOP01 "NONET_L-01_P-001" (solid, remove dead copper, pour order 90): 75.184,18.923 75.184,15.113 81.026,15.113 81.026,18.923
USB2_DP on TOP01 "NONET_L-01_P-001" (solid, remove dead copper, pour order 53): 10.309,8.369 10.309,5.969 8.912,5.969 8.912,8.369 9.293,8.369 9.293,6.731 9.928,6.731 9.928,8.369
GND on BOTTOM04 "NONET_L-01_P-001" (solid, remove dead copper, pour order 127): 0.254,0.254 29.718,0.254 29.718,39.751 0.254,39.751
AGND on BOTTOM04 "NONET_L-01_P-001" (solid, remove dead copper, pour order 72): 75.565,19.538 76.636,19.538 81.026,19.538 81.026,15.113 75.565,15.113
1V8 on BOTTOM04 "NONET_L-01_P-001" (solid, remove dead copper, pour order 51): 80.899,20.574 80.899,19.558 76.636,19.558 75.565,19.558 75.565,20.447 76.708,20.447 76.835,20.574
GND on BOTTOM04 "NONET_L-01_P-001" (solid, remove dead copper, pour order 86): 60.198,39.751 60.198,0.127 89.789,0.127 89.789,39.751
3V3 on BOTTOM04 "BOTTOM04-3V3" (solid, pour order 121): 5.461,10.795 8.89,10.795 8.89,24.111 11.684,26.905 11.684,28.956 16.637,28.956 17.145,28.448 22.479,28.448 22.606,28.321 22.606,26.543 25.146,26.543 25.4,26.797 25.4,27.794 23.984,29.21 19.939,29.21 19.939,30.607 19.685,30.861 10.287,30.861 8.382,28.956 4.445,28.956 4.445,27.432 5.08,26.797 5.08,25.4 2.286,25.4 2.286,23.622 4.953,23.622 5.461,23.114
3V3 on BOTTOM04 "BOTTOM04-3V3 1" (solid, pour order 107): 10.287,11.684 14.859,11.684 14.732,11.811 14.732,14.097 11.303,14.097 11.303,16.256 16.256,16.256 16.637,15.875 16.637,14.097 22.098,14.097 22.225,14.224 22.225,16.256 24.003,16.256 24.892,15.367 26.035,15.367 26.035,16.637 24.765,17.907 20.955,17.907 20.701,17.653 20.701,15.367 18.161,15.367 18.161,17.78 16.637,17.78 16.637,19.685 14.859,19.685 14.859,18.034 10.287,18.034
VBAT on BOTTOM04 "BOTTOM04-VBAT" (solid, pour order 89): 28.702,24.003 29.083,24.384 29.083,27.686 25.4,27.686 25.4,26.797 25.146,26.543 22.606,26.543 22.352,26.289 22.352,23.823 23.315,23.823 23.622,23.517 23.622,20.301 22.587,20.301 22.225,19.939 22.225,17.907 24.13,17.907 24.13,19.558 26.543,19.558 26.543,20.701 25.781,21.463 25.781,23.622 26.162,24.003
3V3 on BOTTOM04 "BOTTOM04-3V3 3" (solid, remove dead copper, pour order 84): 70.231,6.858 84.201,6.858 84.201,18.796 81.407,21.59 77.851,21.59 77.343,22.098 77.343,23.876 75.184,26.035 75.184,32.512 74.295,33.401 71.374,33.401 71.374,32.004 71.628,31.75 72.898,31.75 73.406,31.242 73.406,25.908 75.565,23.749 75.565,20.447 76.708,20.447 76.835,20.574 81.28,20.574 83.185,18.669 83.185,7.874 70.231,7.874
5V0 on BOTTOM04 "BOTTOM04-5V0" (solid, pour order 103): 16.637,8.509 16.637,11.684 10.668,11.684 10.287,12.065 10.287,23.114 12.319,25.146 14.986,25.146 16.256,23.876 18.161,23.876 18.161,26.797 16.129,26.797 16.129,28.956 11.684,28.956 11.684,26.797 8.89,24.003 8.89,9.906 10.287,8.509
NetL1_2 on BOTTOM04 "NETL1_2_L02_P102" (solid, pour order 102): 29.083,27.686 29.083,30.988 28.956,31.115 26.289,31.115 26.289,32.766 24.638,32.766 24.638,31.369 23.495,31.369 23.495,29.591 25.4,27.686

## Other copper
TOP01:
  pour cut-out: 8.636,31.496 8.763,31.369 24.384,31.369 24.384,36.957 24.13,37.211 17.399,37.211 16.891,36.703 6.985,36.703 6.477,36.195 6.477,31.75 6.731,31.496
BOTTOM04:
  pour cut-out: 6.731,37.084 5.969,36.322 5.969,31.242 6.477,30.734 8.128,30.734 8.763,31.369 24.216,31.369 24.216,36.916 24.257,36.957 24.13,37.084 10.795,37.084

## Silkscreen, mask and mechanical layers (free items; w line width, h text height)
Top Overlay:
  drawing of 12 lines, arcs and shapes, not listed
  text "I2C OLED" at 5.969,38.616 h1.52
  text "3V3 GND SCL SDA" at 3.937,37.726 h1.2
  text "On-Board  Antenna" at 8.637,32.268 h1.52
  text "3V3 GND SCL" at 4.521,30.139 h1.2 r270
  text "SDA IMU HRT" at 3.563,30.098 h1.2 r270
  text "EN" at 0.635,28.448 h2
  text "3V3" at 82.677,25.281 h1.5
  text "GND" at 82.678,24.037 h1.5
  text "SCK SD WS" at 25.661,23.494 h1.2 r270
  text "SCL" at 82.678,22.792 h1.5
  text "SDA" at 82.678,21.548 h1.5
  text "IMU" at 82.677,20.303 h1.5
  text "HRT" at 82.677,19.05 h1.5
  text "IO17" at 1.397,17.025 h1.2
  text "IO18" at 3.556,17.025 h1.2
  text "LR GND 3V3" at 25.661,15.748 h1.2 r270
  text "ZYCare" at 14.732,15.516 h4
  text "Hardware Ver 1.1" at 13.716,13.473 h1.8
  text "IO0" at 27.686,10.425 h2
  text "USB-OTG" at 5.969,8.907 h3
  text "USB-UART" at 16.51,8.907 h3
Bottom Overlay:
  drawing of 24 lines, arcs and shapes, not listed
  text "ZYCare" at 20.574,32.026 h4
  text "Hardware Ver 1.0" at 12.827,32.016 h2
  text "ZYCare" at 75.815,31.126 h4
  text "Hardware Ver 1.1" at 76.831,29.083 h1.8
  text "Heart Rate" at 77.851,24.649 h2
  text "2" at 73.786,14.351 h1
  text "SPO" at 76.072,14.362 h2
Mechanical 1:
  the board outline again, w0.1